# Altium PCB SV601275A.PcbDoc (part 3 of 3)
Units mil, origin at the board's own origin, x right, y up, seen from the top; angles counter-clockwise.
Board outline 1980 x 1700 mil, 6 copper layers (Top Layer, MidLayer1, MidLayer2, Mid-Layer 3, Mid-Layer 4, Bottom Layer), stack 61.3 mil thick; 82 components, 37 nets, 191 pads, 177 vias.
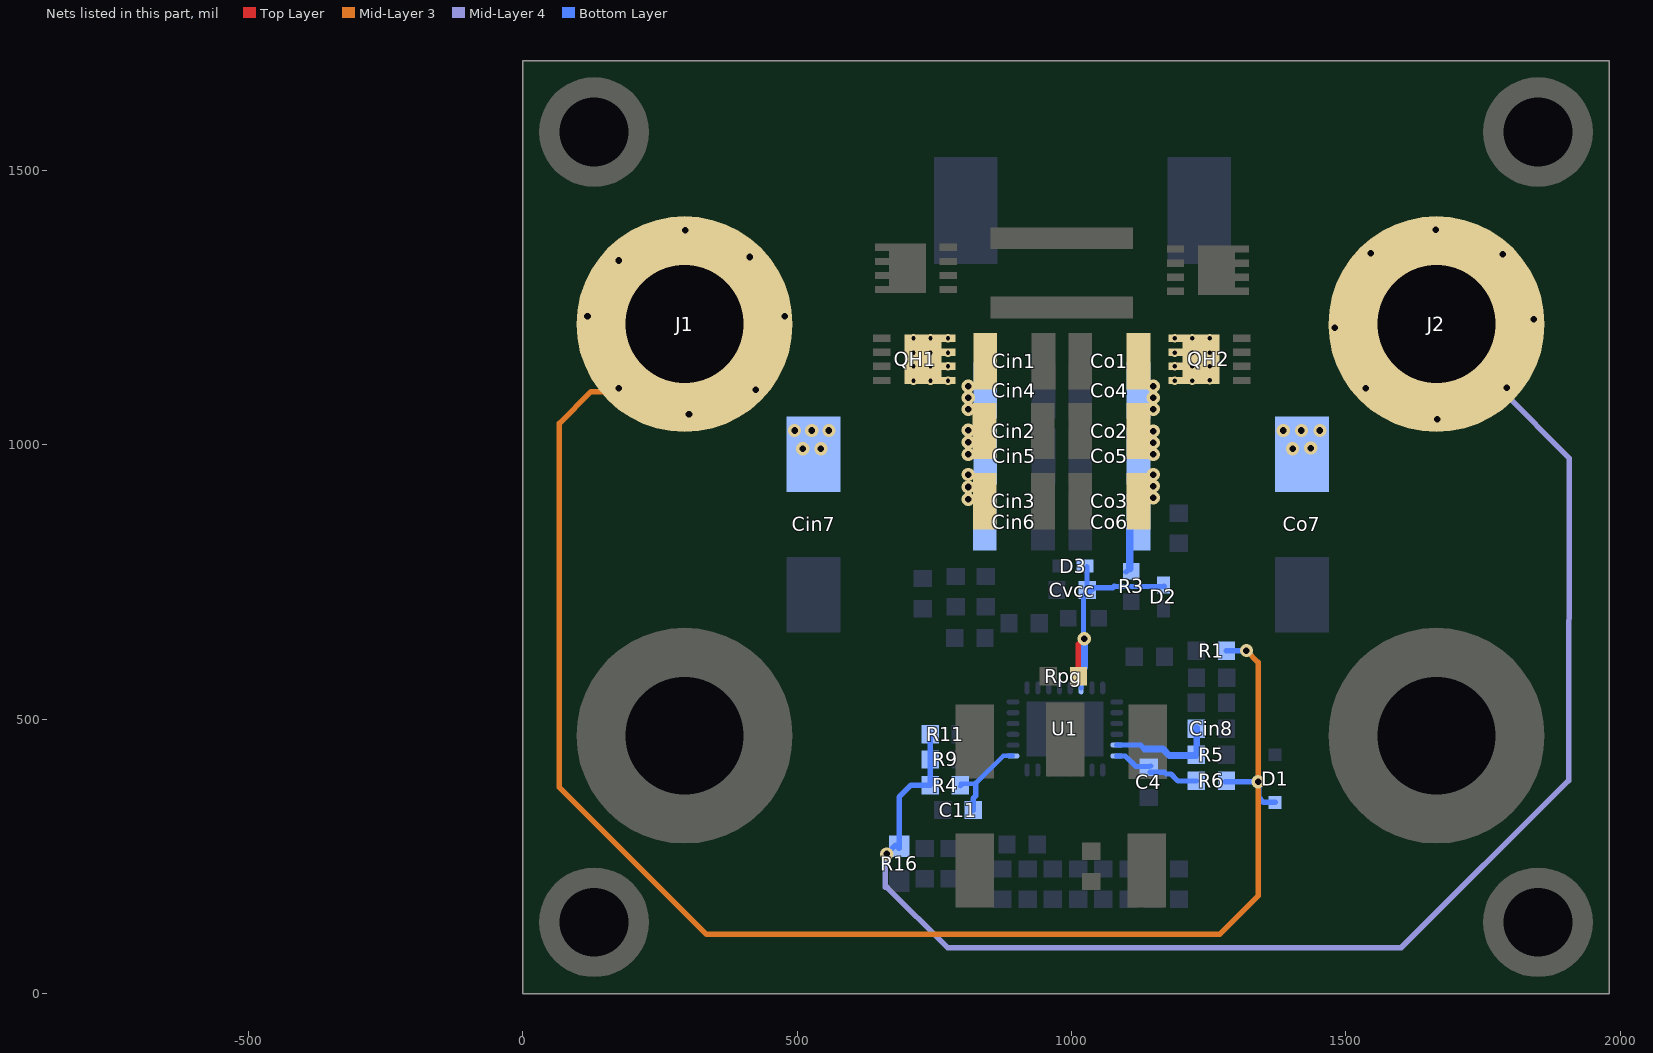
[diagram p6: the nets of this part, all layers, seen from the top]

## Via types
v1: diameter 24, hole 12, Top Layer to Bottom Layer, tented both sides, 91 vias
v2: diameter 15.75, hole 7.87, Top Layer to Bottom Layer, tented both sides, 60 vias
v3: diameter 28, hole 14, Top Layer to Bottom Layer, tented both sides, 17 vias
v4: diameter 19.68, hole 7.87, Top Layer to Bottom Layer, 8 vias
v5: diameter 19.69, hole 7.87, Top Layer to Bottom Layer, 1 vias

## Nets (pads, with @x,y where several pads share a name; then routed paths per layer and width w, separated by ;. In a path a pad name is that pad's centre, name@x,y a point inside that pad or via, vN(x,y) a via of type N, cw(c..) or ccw(c..) an arc to the next point about the centre after c; other vN are vias at no path point) (continued)
VCC: Cvcc.1 D2.2 D3.2 Rpg.1 U1.20 | length 445.8
  Top Layer w10: Rpg.1@1012.72,578.05 1012.72,636.31 v1(1023.16,646.75)
  Bottom Layer w9: v1@1021.96,648.13 Cvcc.1@1021.96,725.37 ; 1077.62,742 D2.2@1169,742
  Bottom Layer w9.4: U1.20@1017.53,557.17 1017.53,587.42 1023.16,593.05
  Bottom Layer w10: Cvcc.1@1021.96,725.37 Cvcc.1@1030.13,733.55 ; v1(1023.16,646.75) v1@1023.34,646.57 ; v1@1023.25,646.84 v1@1023.34,646.75 ; D3.2@1028.26,777.75 1028.26,735.42 Cvcc.1@1030.13,733.55 ; Cvcc.1@1030.46,729 1041.46,740 1075.62,740 1077.62,742 ; Cvcc.1@1033.33,736.75 Cvcc.1@1030.13,733.55
  Bottom Layer w13: 1023.34,594.57 v1@1023.34,646.57
VIN: Cin1.1 Cin2.1 Cin3.1 Cin4.1 Cin5.1 Cin6.1 Cin7.1 D1.2 J1.1 QH1.5 QH1.6 QH1.7 QH1.8 QH1.9 R1.2 R6.1 | length 2812.5
  Mid-Layer 3 w10: J1.1@164.87,1096.98 124.83,1096.98 67,1039.15 67,376 335,108 1269.98,108 1340,178.02 v1(1340,386.08) 1340,603.75 v1(1318.75,625)
  Bottom Layer w10: R6.1@1280,386.15 1282.56,386.15 v1(1340,386.08) ; R1.2@1282,625 v1(1318.75,625) ; v1@1341.61,386.15 1341.61,357.01 1349.93,348.69 D1.2@1371,348.69
  other v1: 812,900.75 812,923.25 812,945.75 812,982.62 510.38,993 543.29,993 812,1004.75 495.38,1026.16 526.71,1026.16 558,1026.16 812,1026.75 303,1055.87 812,1064.75 812,1085.75 424.38,1100.35 175,1103 812,1106.74 118,1234 477.15,1234 175,1336 414,1342.23 296,1390.84
  other v2: 712,1117 743,1117 775,1117 712,1143 743,1143 775,1143 712,1168 743,1168 775,1168 712,1194 743,1194 775,1194
VIN_IC: Cin8.1 R5.1 U1.27 | length 202.8
  Bottom Layer w9.4: U1.27@1082.49,452.84 1126.16,452.84
  Bottom Layer w10: 1126.16,452.84 1133.21,445.79
  Bottom Layer w12: 1133.21,445.79 1166.5,445.79 1178.3,434 1227,434 1228.25,435.25 Cin8.1@1228.25,484
VISNS: C4.2 R6.2 U1.28 | length 155.7
  Bottom Layer w9.4: U1.28@1082.49,433.15 1098,433.15 1117.42,413.73 C4.2@1140.84,413.73 ; C4.2@1142.98,403.41 1169.23,403.41 1172.64,400 1181.15,400 1192.44,388.71 ; C4.2@1144.38,414.78 C4.2@1144.59,415 ; 1194,387.63 R6.2@1227.44,387.63
VOUT: Co1.1 Co2.1 Co3.1 Co4.1 Co5.1 Co6.1 Co7.1 J2.1 QH2.5 QH2.6 QH2.7 QH2.8 QH2.9 R3.2 R4.2 R9.1 R11.1 R16.1 | length 2678.2
  Mid-Layer 4 w10: 661,193.74 v1@661,254.75 ; 664.08,193.74 774.27,84 1600.9,84 1905.85,388.06 1906.77,975.98 1786.85,1095.9 1791.46,1100.5 1791.46,1125.9 1793.16,1124.19 v1(1793.16,1104) J2.1@1793.16,1100.97
  Bottom Layer w10: v1@657.22,254.75 v1(663.4,254.75) 679.4,270.75 R16.1@685.4,264.75 ; R16.1@685.96,265.05 686,358.2 707.8,380 R4.2@742.44,380 R11.1@742.44,473.84 ; R3.2@1099,768.3 R3.2@1100.24,769.03 ; Co6.1@1106,849.64 Co6.1@1122.11,865.75
  Bottom Layer w14: R3.2@1106,774.24 Co6.1@1106,849.64
  other v1: 1149,903.75 1149,924.75 1149,945.75 1149,982.62 1403,993 1436,994 1149,1003.88 1149,1025.14 1386,1026.16 1419,1026.16 1452.68,1026.16 1666.16,1046.9 1149,1064.75 1149,1085.75 1536,1103 1149,1106.75 1480,1213.74 1842.16,1228.9 1786,1347 1545,1349 1664,1391.61
  other v2: 1188.16,1117 1220,1117 1252,1118 1188,1143 1220,1143 1252,1143 1188,1168 1220,1168 1252,1168 1188,1194 1220,1194 1252,1194
VOUTSNS: C11.1 R4.1 U1.9 | length 169.2
  Bottom Layer w8: R4.1@797.56,377.56 R4.1@800,380 ; R4.1@798,382.26 824.61,382.26 825.96,383.61 ; 827.35,385 875.5,433.15 U1.9@893.51,433.15
  Bottom Layer w10: C11.1@820.78,334.58 820.78,355.44 825.96,360.63 825.96,383.61
pads on no net: H3. H4. H5.0 H6.0 H7. H8. LBL1.0

## Polygon pours and split planes (outlines as drawn)
SW2 on Bottom Layer "Bottom Layer-SW2" (solid, pour order 64): 1325.65,1268 1325.65,1526 1179,1526 1179.37,1268
GND on Bottom Layer "Bot Layer-GND2" (solid, remove dead copper, pour order 69): 7.82,1217.2 1962.51,1216.97 1969.62,1299.34 1969.62,14 9.63,14
VIN on Bottom Layer "Bot Layer-VIN" (solid, remove dead copper, pour order 68): 869.8,1211.23 707.81,1211.79 707.81,1688.01 13.64,1687.97 11.93,855.39 730.43,855.39 868.97,855.27
VOUT on Bottom Layer "Bot Layer-VOUT" (solid, remove dead copper, pour order 67): 1098,1221.29 1238.86,1221.29 1267.63,1191.99 1267.63,1105.09 1340.03,1105.09 1340.98,1690.13 1964,1688.1 1964,850.76 1271.27,853.21 1222.99,853.4 1222.88,895.92 1164.46,895.92 1152.56,882.78 1152.56,807 1098,807 1098.16,854.42
SW1 on Bottom Layer "Bottom Layer-No Net" (solid, remove dead copper, pour order 65): 631.4,1139.6 636.21,1134.79 679.79,1134.79 684.06,1139.06 684.06,1215.22 694.84,1226 920.29,1226 940.04,1245.75 940.04,1535.96 926,1550 741,1550 714,1523 714,1381 713.29,1380.71 650.1,1380.97 632.69,1363.66
SW2 on Bottom Layer "Bottom Layer-No Net 1" (solid, remove dead copper, pour order 66): 1294.99,1109 1369.55,1109 1376.94,1116.64 1377,1320.26 1351,1346 1326,1371 1325.83,1519.99 1324.28,1523.73 1298.01,1549.98 1078.03,1550.03 1048.93,1520.94 1048.93,1243.96 1066.66,1226 1280.96,1226.05 1288.25,1218.74 1288.02,1115.99
VIN on Top Layer "Top Layer-VIN" (solid, remove dead copper, pour order 41): 865.14,1216.99 683,1217.01 683,1108 627,1108 627,1265 972,1265 972,1689 14,1689.97 14,844.78 865,844.03
NetQl1_1 on Top Layer "Top Layer-Q1-1" (solid, pour order 38): 759.96,1342.61 800,1343 800,1441 813,1454 1195.02,1454 1205.99,1442.99 1205.39,1276.51 759.96,1276.51
GND on Top Layer "Top Layer-GND2" (solid, remove dead copper, pour order 42): 10,830 1970,830 1970,10 10,10
VOUT on Top Layer "Top Layer-VOUT" (solid, remove dead copper, pour order 40): 1098.99,1218.65 1279,1219 1279,1100 1384.49,1099.65 1383.03,1409.78 997.88,1409.78 997.85,1689 1965.66,1688.74 1971.03,843.97 1099,844.03
SW2 on Top Layer "Top Layer-SW2" (solid, remove dead copper, pour order 37): 1238.2,1398 1374.48,1398 1387.1,1385.32 1386.89,1118.89 1379,1111 1293,1111 1293,1244 1228,1244 1228.26,1388.08
GND on Top Layer "Top Layer-GND" (solid, remove dead copper, pour order 39): 884.02,1266 1077,1266 1076.7,765.16 908.64,765.16 883.63,769.22
SW1 on Top Layer "Top Layer-SW1" (solid, remove dead copper, pour order 36): 597.89,1142.51 598.13,1371.14 608.04,1381.03 733.71,1381.03 740,1374.75 740,1271.83 740,1231 733,1224 691.76,1224 674.07,1205.9 672.78,1205.01 672.78,1139.8 668.73,1135.7 605.43,1135.04
GND on MidLayer2 "MidLayer2-GND" (solid, pour order 53): 14.55,1690.59 15.54,1689.62 1960.63,1689.62 1963.55,1686.76 1965,9 1912.53,11.14 -14,11.14 12.48,37.08 12.48,1687.64
SW2 on MidLayer2 "MidLayer1-No Net 1" (solid, remove dead copper, pour order 51): 1234.85,1387.85 1329.36,1387.85 1337.02,1380.18 1336.98,1253.33 1331.66,1248 1234,1248 1228,1254 1228,1381
SW1 on MidLayer2 "MidLayer1-No Net 1" (solid, remove dead copper, pour order 50): 633.76,1381 734.5,1381 740.29,1375.21 740.26,1256.65 734.6,1251 633,1251 628,1256 628,1375.24
VIN on MidLayer2 "MidLayer1-No Net 1" (solid, remove dead copper, pour order 49): 699.3,1217.43 784.96,1217.43 792.74,1209.65 792.7,1097.81 787.65,1092.76 699.24,1092.76 692.96,1099.04 692.96,1211.08
VOUT on MidLayer2 "MidLayer1-No Net 1" (solid, remove dead copper, pour order 48): 1180.7,1215.92 1266.97,1215.92 1273.03,1209.85 1273,1099.73 1266.35,1093.08 1178.12,1093.08 1173.32,1097.88 1173.32,1208.54
NetQl1_1 on MidLayer2 "Top Layer-Q1-1" (solid, pour order 52): 760,1343 800.04,1343.39 800.04,1441.39 813.04,1454.39 1195.06,1454.39 1206.03,1443.38 1205.44,1276.9 760,1276.9
VOUT on MidLayer1 "Mid-Layer1-VOUT" (solid, remove dead copper, pour order 46): 1131.25,859.29 1131.25,1671.01 1961,1672.99 1962,859
VIN on MidLayer1 "MId-Layer-1-VIN" (solid, remove dead copper, pour order 45): 829,1689 13.3,1689 12.87,864 828,864
GND on MidLayer1 "Mid Layer1-GND2" (solid, remove dead copper, pour order 47): 14.16,1665.13 1963.85,1673.87 1962.85,10.79 15.16,5.78
SW1 on MidLayer1 "MidLayer1-No Net" (solid, remove dead copper, pour order 43): 632.24,1381.24 732.76,1381.24 740.23,1373.76 740.23,1254.84 732.4,1247 635,1247 625,1257 625,1374
SW2 on MidLayer1 "MidLayer1-No Net 1" (solid, remove dead copper, pour order 44): 1236.54,1392.54 1333.46,1392.54 1341.02,1384.98 1340.98,1253.98 1332.35,1245.35 1233.97,1245.35 1228,1251.32 1228,1384
GND on Mid-Layer 4 "Mid-Layer 4-GND" (solid, pour order 63): 17.57,1688.52 21.22,1692 1974,1692 1967.53,1685.83 1967.53,8.08 1963.24,4 17.57,4
VIN on Mid-Layer 4 "MidLayer1-No Net 1" (solid, remove dead copper, pour order 59): 699.08,1219 786.55,1219 793.02,1212.52 792.99,1098.74 786.95,1092.7 698.41,1092.7 692.57,1098.54 692.57,1212.49
SW1 on Mid-Layer 4 "MidLayer1-No Net 1" (solid, remove dead copper, pour order 61): 633.7,1381 718,1381 740.75,1358.25 740.71,1255.71 735,1250 632.42,1250 628,1254.42 628,1375.3
SW2 on Mid-Layer 4 "MidLayer1-No Net 1" (solid, remove dead copper, pour order 62): 1232,1389 1333.06,1389 1338.03,1384.03 1337.98,1253.4 1332.58,1248 1233,1248 1228,1253 1228,1385
VOUT on Mid-Layer 4 "MidLayer1-No Net 1" (solid, remove dead copper, pour order 60): 1176.64,1219 1269,1219 1274.03,1213.97 1273.99,1098.12 1267.87,1092 1175.5,1092 1170.64,1096.86 1170.64,1213
GND on Mid-Layer 3 "Mid-Layer 3-GND" (solid, pour order 58): 24.19,1667.41 27.51,1670.55 1963.27,1670.55 1969.19,1664.97 1969.19,10.09 1968.77,9.7 24.19,9.7
SW1 on Mid-Layer 3 "MidLayer1-No Net 1" (solid, remove dead copper, pour order 56): 634.72,1381.31 735.52,1381.31 740.81,1376.01 740.77,1256.77 735,1251 633,1251 628,1256 628,1374.58
SW2 on Mid-Layer 3 "MidLayer1-No Net 1" (solid, remove dead copper, pour order 57): 1232.74,1389 1332.45,1389 1338.02,1383.43 1337.98,1254.98 1330.82,1247.83 1234.17,1247.83 1227.85,1254.15 1227.85,1384.11
VOUT on Mid-Layer 3 "MidLayer1-No Net 1" (solid, remove dead copper, pour order 55): 1177.26,1219 1269.39,1219 1273.6,1214.79 1273.56,1096.68 1269.89,1093 1178.37,1093 1171,1100.37 1171,1212.74
VIN on Mid-Layer 3 "MidLayer1-No Net 1" (solid, remove dead copper, pour order 54): 697.32,1218.24 786.91,1218.24 792.02,1213.12 791.99,1099.23 785.76,1093 702,1093 693.57,1101.43 693.57,1214.49

## Keep-outs
Keep-Out Layer:
  lines w10: -5,-5 -5,1705 1985,1705 1985,-5 -5,-5

## Other copper
Top Layer:
  pour cut-out: 961.39,1332.47 961.39,1332.9 cw(c985.32,1332.9) 985.32,1356.83 985.97,1356.83 cw(c985.97,1332.47) 1010.33,1332.47 cw(c987.19,1332.47) 987.19,1309.33 984.53,1309.33 cw(c984.53,1332.47)
  pour cut-out: 961.39,1292.86 cw(c985.54,1293.07) 985.32,1317.22 985.97,1317.22 cw(c985.97,1292.86) 1010.33,1292.86 cw(c987.19,1292.86) 985.87,1269.75 cw(c984.53,1292.86)
  pour cut-out: 825.44,782.37 823.58,773 818.27,765.06 810.33,759.76 800.97,757.9 791.6,759.76 783.67,765.06 778.36,773 776.5,782.37 778.36,791.73 783.67,799.67 791.6,804.98 800.97,806.84 810.33,804.98 818.27,799.67 823.58,791.73
  pour cut-out: 919.86,711.86 918,702.49 912.69,694.55 904.75,689.25 895.39,687.39 886.03,689.25 878.09,694.55 872.78,702.49 870.92,711.86 872.78,721.22 878.09,729.16 886.03,734.47 895.39,736.33 904.75,734.47 912.69,729.16 918,721.22
  text ".Layer_Name" at 129,-1122.49 h60
MidLayer1:
  pour cut-out: 961.28,1292.95 961.28,1293.38 cw(c985.21,1293.38) 985.21,1317.31 985.86,1317.31 cw(c985.86,1292.95) 1010.22,1292.95 cw(c987.08,1292.95) 987.08,1269.81 984.42,1269.81 cw(c984.42,1292.95)
  pour cut-out: 961.49,1333.47 961.49,1333.9 cw(c985.42,1333.9) 985.42,1357.83 986.07,1357.83 cw(c986.07,1333.47) 1010.43,1333.47 cw(c987.29,1333.47) 987.29,1310.33 984.63,1310.33 cw(c984.63,1333.47)
  pour cut-out: 826.32,781.54 824.45,772.17 819.15,764.24 811.21,758.93 801.85,757.07 792.48,758.93 784.54,764.24 779.24,772.17 777.38,781.54 779.24,790.9 784.54,798.84 792.48,804.15 801.85,806.01 811.21,804.15 819.15,798.84 824.45,790.9
  text ".layer_Name" at 129,-1124 h60
MidLayer2:
  pour cut-out: 961.07,1291.95 961.07,1292.38 cw(c985,1292.38) 985,1316.31 985.65,1316.31 cw(c985.65,1291.95) 1010.01,1291.95 cw(c986.87,1291.95) 986.87,1268.81 984.21,1268.81 cw(c984.21,1291.95)
  pour cut-out: 961.07,1332.86 961.07,1333.29 cw(c985,1333.29) 985,1357.22 985.65,1357.22 cw(c985.65,1332.86) 1010.01,1332.86 cw(c986.87,1332.86) 986.87,1309.72 984.21,1309.72 cw(c984.21,1332.86)
  pour cut-out: 825.44,782.37 823.58,773 818.27,765.06 810.33,759.76 800.97,757.9 791.6,759.76 783.67,765.06 778.36,773 776.5,782.37 778.36,791.73 783.67,799.67 791.6,804.98 800.97,806.84 810.33,804.98 818.27,799.67 823.58,791.73
  text ".layer_Name" at 129,-1122 h60
Mid-Layer 3:
  pour cut-out: 960.88,1333.26 960.88,1333.69 cw(c984.81,1333.69) 984.81,1357.62 985.46,1357.62 cw(c985.46,1333.26) 1009.82,1333.26 cw(c986.68,1333.26) 986.68,1310.12 984.02,1310.12 cw(c984.02,1333.26)
  pour cut-out: 960.79,1292.49 960.79,1292.92 cw(c984.73,1292.92) 984.73,1316.85 985.38,1316.85 cw(c985.38,1292.49) 1009.73,1292.49 cw(c986.59,1292.49) 986.59,1269.35 983.93,1269.35 cw(c983.93,1292.49)
  pour cut-out: 825.44,782.37 823.58,773 818.27,765.06 810.33,759.76 800.97,757.9 791.6,759.76 783.67,765.06 778.36,773 776.5,782.37 778.36,791.73 783.67,799.67 791.6,804.98 800.97,806.84 810.33,804.98 818.27,799.67 823.58,791.73
  text ".layer_Name" at 127,-1124 h60
Mid-Layer 4:
  pour cut-out: -788.42,451.51 cw(c-788.42,469.86) -806.77,469.86 cw(c-788.42,469.86) -788.42,488.22 cw(c-788.42,469.86) -770.07,469.86 cw(c-788.42,469.86)
  pour cut-out: 961.44,1332.76 961.44,1333.19 cw(c985.37,1333.19) 985.37,1357.12 986.02,1357.12 cw(c986.02,1332.76) 1010.38,1332.76 cw(c987.24,1332.76) 987.24,1309.62 984.58,1309.62 cw(c984.58,1332.76)
  pour cut-out: 961.23,1293.6 961.23,1294.03 cw(c985.16,1294.03) 985.16,1317.96 985.81,1317.96 cw(c985.81,1293.6) 1010.17,1293.6 cw(c987.03,1293.6) 987.03,1270.46 984.37,1270.46 cw(c984.37,1293.6)
  pour cut-out: 825.14,781.61 823.27,772.24 817.97,764.3 810.03,759 800.67,757.14 791.3,759 783.36,764.3 778.06,772.24 776.2,781.61 778.06,790.97 783.36,798.91 791.3,804.22 800.67,806.08 810.03,804.22 817.97,798.91 823.27,790.97
  text ".layer_Name" at 127,-1118 h60
Bottom Layer:
  rectangle net VOUT: 1131.67,815.36 1152,887.75
  pour cut-out: 961.49,1332.05 961.49,1332.48 cw(c985.42,1332.48) 985.42,1356.41 986.07,1356.41 cw(c986.07,1332.05) 1010.43,1332.05 cw(c987.29,1332.05) 987.29,1308.91 984.63,1308.91 cw(c984.63,1332.05)
  pour cut-out: 961.79,1293.37 961.79,1293.8 cw(c985.72,1293.8) 985.72,1317.73 986.37,1317.73 cw(c986.37,1293.37) 1010.73,1293.37 cw(c987.59,1293.37) 987.59,1270.23 984.93,1270.23 cw(c984.93,1293.37)
  pour cut-out: 1383.95,389.24 1430,389.24 1430,8.56 1418,8.56 1418,379.17 1384.02,379.17
  pour cut-out: 771,172 771,14.81 784,14.81 784,172
  pour cut-out: 880.61,541.77 1120.5,541.77 1117.31,544.97 1117.31,554.75 1113.26,558.79 890.03,558.79
  pour cut-out: 819,799.75 818.62,799.37 818.62,734.47 739,734.47 739,805 819,805
  text ".Layer_Name" at 129,-1122.49 h60

## Silkscreen, mask and mechanical layers (free items; w line width, h text height)
Top Overlay:
  region: 1740.56,775.58 1740.56,697 1937.08,697 1937.08,775.58
  text "VOUT" at 1470,1502 h50
  text "VIN" at 318,1492 h50
  text ".PRJ_Number" at 1294.56,713 h40
  text ".PCB_Rev" at 1636,713 h40
  text "-" at 1689.56,710 h40
  text "GND" at 302,136 h60
  text "GND" at 1541,130 h60
  text ".Layer_Name" at 129,-1122.49 h60
Bottom Overlay:
  text ".Layer_Name" at 129,-1122.49 h60
Top Paste:
  text ".Layer_Name" at 129,-1122.49 h60
Bottom Paste:
  text ".Layer_Name" at 129,-1122.49 h60
Top Solder:
  text ".Layer_Name" at 129,-1122.49 h60
  text ".Layer_Name" at 129,-1122.49 h60
Bottom Solder:
  text ".Layer_Name" at 129,-1122.49 h60
Drill Guide:
  text ".Layer_Name" at 129,-1122.49 h60
M1 Board Outline:
  the board outline again, w10
  text ".Layer_Name" at 129,-1122.49 h60
M2 Board Dimensions:
  rectangle: -471.5,-618.5 -96.5,-493.5
  rectangle: -596.5,-493.5 -471.5,-368.5
  lines w7: -596.5,-493.5 403.5,-493.5 ; -471.5,-618.5 -471.5,-368.5 ; -346.5,-618.5 -346.5,-368.5 ; -96.5,-618.5 -96.5,-368.5 ; 153.5,-618.5 153.5,-368.5 ; -596.5,-618.5 403.5,-618.5 403.5,-368.5 -596.5,-368.5 -596.5,-431 -596.5,-556 -596.5,-618.5
  lines w10: -596.5,-683.5 -596.5,-663.5 ; -536.5,-693.5 -596.5,-673.5 ; -536.5,-653.5 -596.5,-673.5 ; -372.42,-673.5 -596.5,-673.5 ; 179.42,-673.5 403.5,-673.5 ; 343.5,-693.5 403.5,-673.5 ; 343.5,-653.5 403.5,-673.5 ; 403.5,-683.5 403.5,-663.5
  text "1000 (mil)" at -362.42,-709.49 h60
  text ".Layer_Name" at 129,-1122.49 h60
M3 3D STEP Top:
  text ".Layer_Name" at 129,-1122.49 h60
M4 3D STEP Bottom:
  text ".Layer_Name" at 129,-1122.49 h60
M5 Assembly Top:
  lines w10: -740,-1194.17 5860,-1194.17 ; -740,-990.83 5862,-990.83 ; -740,-787.5 -740,-1397.5 3265,-1397.5 5862,-1397.5 5862,-787.5 -739.5,-787.5 -739.5,-1397.5 836,-1397.5 ; 1725,-1397.5 1725,-787.5 ; 2992,-990.83 2992,-787.5 ; 3832,-990.83 3832,-787.5 ; 4454,-1404 4454,-1201.17
  text "SYNC" at 1156,152 h40 r90
  text "COMPONENTS MARKED 'DNP' SHOULD NOT BE POPULATED." at 705.5,-582.5 h60
  text "ASSEMBLY VARIANT:" at 705,-698 h60
  text ".VariantName" at 1741,-698 h60
  text "PCB VIEWED FROM TOP SIDE" at -676.5,-919.67 h60
  text "BOARD #:" at 1800,-919.67 h60
  text ".PRJ_Number" at 2345.5,-919.67 h60
  text "REV:" at 3190,-919.67 h60
  text ".PCB_Rev" at 3481.5,-919.67 h60
  text "SVN REV:" at 4028,-919.67 h60
  text ".VersionControl_RevNumber" at 4534,-919.67 h60
  text "IGNORE ->" at -676.5,-1122.49 h60
  text "PLOT NAME =" at -676.5,-1328.34 h60
  text ".plot_File_Name" at 129,-1328.34 h60
  text "GENERATED    :" at 1802,-1328.34 h60
  text ".Print_Date" at 2671.5,-1328.34 h60
  text ".Print_Time" at 3400.5,-1328.34 h60
  text "TEXAS INSTRUMENTS" at 4665,-1328.34 h60
M6 Assembly Bottom:
  lines w10: -740.5,-991.33 5861.5,-991.33 ; -738.5,-1194.67 5861.5,-1194.67 ; 667.5,-1404.5 667.5,-1201.67 ; 1289.5,-991.33 1289.5,-788 ; 2129.5,-991.33 2129.5,-788 ; 3396.5,-1398 3396.5,-788 ; 4285.5,-1398 5861,-1398 5861,-788 -740.5,-788 -740.5,-1398 1856.5,-1398 5861.5,-1398 5861.5,-788
  text "SVN REV:" at 1089,-451 h60
  text "COMPONENTS MARKED 'DNP' SHOULD NOT BE POPULATED." at 5654,-582 h60
  text ".VariantName" at 4610,-698 h60
  text "ASSEMBLY VARIANT:" at 5649,-698 h60
  text ".VersionControl_RevNumber" at 587.5,-920.17 h60
  text ".PCB_Rev" at 1640,-920.17 h60
  text "REV:" at 1931.5,-920.17 h60
  text ".PRJ_Number" at 2776,-920.17 h60
  text "BOARD #:" at 3321.5,-920.17 h60
  text "PCB VIEWED FROM BOTTOM SIDE" at 5798,-920.17 h60
  text "IGNORE ->" at 2099.85,-1122.49 h60
  text "TEXAS INSTRUMENTS" at 456.5,-1328.84 h60
  text ".Print_Time" at 1721,-1328.84 h60
  text ".Print_Date" at 2450,-1328.84 h60
  text "GENERATED    :" at 3319.5,-1328.84 h60
  text ".plot_File_Name" at 4992.5,-1328.84 h60
  text "PLOT NAME =" at 5798,-1328.84 h60
M9 Title Sheet:
  lines w10: -939.5,777.5 -739.5,777.5 ; -939.5,3152.5 -739.5,3152.5 ; -939.5,5527.5 -739.5,5527.5 ; 1560.5,-1597.5 1560.5,-1397.5 ; 1560.5,7702.5 1560.5,7902.5 ; 4060.5,-1597.5 4060.5,-1397.5 ; 4060.5,7702.5 4060.5,7902.5 ; 5873,-1397.5 5873,-787.5 10855.5,-787.5 ; 6560.5,-1597.5 6560.5,-1397.5 ; 6560.5,7702.5 6560.5,7902.5 ; 9060.5,-1597.5 9060.5,-1397.5 ; 9060.5,7702.5 9060.5,7902.5 ; 10855.5,-1397.5 10855.5,-787.5 ; 10855.5,-1087.5 13855.5,-1087.5 ; 10855.5,-487.5 13855.5,-487.5 ; 10856.5,106.5 13856.5,106.5 ; 11560.5,-1597.5 11560.5,-1397.5 ; 11560.5,7702.5 11560.5,7902.5 ; 12360.5,-1387.5 12360.5,-787.5 ; 13855.5,-787.5 10855.5,-787.5 ; 13855.5,-187.5 10855.5,-187.5 ; 13860.5,-197.5 13860.5,-1397.5 ; 13860.5,607 10856.5,607 10855.5,607 10855.5,106.5 10855.5,-187.5 ; 13860.5,777.5 14060.5,777.5 ; 13860.5,3152.5 14060.5,3152.5 ; 13860.5,5527.5 14060.5,5527.5 ; 10855.5,-787.5 10855.5,-187.5 ; 13860.5,-1397.5 -739.5,-1397.5 -739.5,7702.5 13860.5,7702.5 13860.5,-1397.5 ; -939.5,-1597.5 14060.5,-1597.5 14060.5,7902.5 -939.5,7902.5 -939.5,-1597.5
  text "1" at 291.84,7772.5 h70
  text "2" at 2787.5,7772.5 h70
  text "3" at 5276.84,7772.5 h70
  text "4" at 7783.51,7772.5 h70
  text "5" at 10282.5,7772.5 h70
  text "6" at 12787.5,7772.5 h70
  text "A" at -864.5,6629.5 h70
  text "A" at 13935.5,6629.5 h70
  text "B" at -864.5,4249.5 h70
  text "B" at 13935.5,4249.5 h70
  text "C" at -864.5,1874.5 h70
  text "C" at 13935.5,1874.5 h70
  text "PROJECT TITLE:" at 10895.5,13.5 h45
  text ".PRJ_Number" at 10945.5,-119.83 h70
  text "DESIGNED FOR:" at 10895.5,-287.5 h45
  text ".PRJ_Customer" at 10945.5,-427.5 h70
  text "D" at -864.5,-495.5 h70
  text "D" at 13935.5,-495.5 h70
  text "FILE NAME:" at 10895.5,-587.5 h45
  text ".PRJ_Title" at 10945.5,-707.5 h70
  text "ENGINEER:" at 10895.5,-877.5 h45
  text "LAYOUT BY:" at 12400.5,-877.5 h45
  text ".PRJ_Engineer" at 10945.5,-1032.49 h70
  text ".PCB_Layout" at 12451,-1032.49 h70
  text ".Layer_Name" at 129,-1122.49 h60
  text "ALTIUM DESIGNER VERSION:" at 12400.5,-1187.5 h45
  text "1:1" at 10945.5,-1320.83 h70
  text ".Application_BuildNumber" at 12451,-1320.83 h70
  text "1" at 291.84,-1527.5 h70
  text "2" at 2787.5,-1527.5 h70
  text "3" at 5276.84,-1527.5 h70
  text "4" at 7783.51,-1527.5 h70
  text "5" at 10282.5,-1527.5 h70
  text "6" at 12787.5,-1527.5 h70
M10 Fab Notes:
  drawing of 185 lines, arcs and shapes, not listed
  text "DESIGN INFORMATION" at 11925.02,5657.55 h60
  text "MIN. TRACK WIDTH:" at 11280.46,5477.55 h60
  text "8" at 12376.7,5477.55 h60
  text "MIL" at 12531.46,5477.55 h60
  text "MIN. CLEARANCE:" at 11280.46,5345.55 h60
  text "0.2" at 12316.7,5345.55 h60
  text "mm" at 12531.46,5345.55 h60
  text "MIN. VIA PAD SIZE:" at 11280.46,5213.55 h60
  text "24" at 12346.71,5213.55 h60
  text "MIL" at 12531.46,5213.55 h60
  text "0.05mm (2MIL)" at 11975.46,5071.84 h60
  text "MINIMUM ANNULAR RING" at 10951.23,5067.55 h60
  text "EXTERNAL" at 12683.46,5067.55 h60
  text "PER" at 11151.23,4949.55 h60
  text "IPC-D-275 CLASS 2 LEVEL C" at 11371.23,4949.55 h60
  text "+/-" at 12467,4836.55 h60
  text "MIL, HOLES" at 12859.46,4837.26 h60
  text "+/-" at 13321,4836.55 h60
  text "REGISTRATION TOLERANCES:" at 10951.23,4831.55 h60
  text "METAL" at 12151,4831.55 h60
  text "5" at 12727.2,4831.55 h60
  text "3" at 13560.2,4831.55 h60
  text "MIL" at 13676.46,4831.55 h60
  text "MATERIAL:" at 10876.46,4622.09 h60
  text "FR-4 High Tg" at 11862.9,4481.76 h60
  text "FR-408" at 11297.46,4473.19 h60
  text "X" at 11709.46,4473.19 h60
  text "OTHER" at 12785.46,4473.19 h60
  text "62 MIL (1.6mm) +/-10%" at 11617.56,4310.47 h60
  text "THICKNESS:" at 10951.23,4306.19 h60
  text "X" at 11489.4,4306.19 h60
  text "OTHER" at 12902.46,4306.19 h60
  text "TOLERANCE:" at 10951.23,4148.19 h60
  text "X" at 11790.53,4148.19 h60
  text "ANSI IPC-6012 TYPE 3 CLASS 2" at 11977.48,4148.19 h60
  text "OTHER +/-" at 11977.46,3992.19 h60
  text "BOW & TWIST:" at 10951.23,3835.19 h60
  text "X" at 11790.53,3835.19 h60
  text "ANSI IPC-6012 TYPE 3 CLASS 2" at 11977.48,3835.19 h60
  text "OTHER +/-" at 11977.46,3676.68 h60
  text "DRILLING:" at 10876.46,3538.19 h60
  text "REFERENCE:" at 10951.23,3421.19 h60
  text "X" at 11599.46,3421.19 h60
  text "AS SHOWN" at 11786.46,3421.19 h60
  text "X" at 12500.46,3421.19 h60
  text "NC_DRILL FILES" at 12637.46,3421.19 h60
  text "PTH MIN COPPER THICKNESS:" at 10951.23,3263.19 h60
  text "X" at 12301.46,3263.19 h60
  text "1MIL" at 12438.46,3263.19 h60
  text "OTHER" at 12935.46,3263.19 h60
  text "BOARD FINISH:" at 10876.46,3104.19 h60
  text "SILKSCREEN:" at 11031.68,2986.19 h60
  text "X" at 11980.46,2986.19 h60
  text "TOP" at 12106.46,2986.19 h60
  text "X" at 12490.46,2986.19 h60
  text "BOTTOM" at 12617.46,2986.19 h60
  text "SILKSCREEN COLOR:" at 11031.68,2819.19 h60
  text "X" at 11979.42,2819.19 h60
  text "WHITE" at 12106.46,2819.19 h60
  text "OTHER" at 12617.46,2819.19 h60
  text "SOLDER RESIST COLOR:" at 11031.68,2649.19 h60
  text "X" at 11597,2491 h60
  text "GREEN" at 11726.46,2489.99 h60
  text "BLUE" at 12317.46,2489.99 h60
  text "OTHER" at 12855.46,2489.99 h60
  text "IMMERSION GOLD (ENIG)" at 11937.46,2301.47 h60
  text "ENEPIG" at 13275,2298.19 h60
  text "SURFACE FINISH:" at 10876.46,2297.19 h60
  text "X" at 11750.51,2297.19 h60
  text "IMM. TIN/SILVER OR EQUIV" at 11206,2140.19 h60
  text "OTHER" at 12637.46,2140.19 h60
  text "ARRAY/PANEL:" at 10876.46,1961.19 h60
  text "CUT AND TRIM PER MECH LAYER 1" at 11937.46,1956.9 h60
  text "X" at 12614,1807.55 h60
  text "N.C. ROUTE" at 11937.46,1805.19 h60
  text "V. SCORE" at 12803.46,1805.19 h60
  text "CERTIFICATION:" at 10876.46,1668.19 h60
  text "MATERIALS AND WORKMANSHIP FOR ALL PCBS" at 11601.46,1668.19 h60
  text "TO MEET OR EXCEED THE REQUIREMENTS OF:" at 11601.46,1570.19 h60
  text "X" at 11227.96,1433.68 h60
  text "ANSI IPC-A-600F CLASS ->" at 11366.96,1433.68 h60
  text "X" at 13006.02,1433.68 h60
  text "2" at 13124.96,1433.68 h60
  text "1" at 12809.96,1432.19 h60
  text "3" at 13478.96,1432.19 h60
  text "X" at 11230.02,1274.19 h60
  text "UL 94V-0" at 11366.96,1274.19 h60
  text "X" at 12042.02,1274.19 h60
  text "RoHS" at 12178.96,1274.19 h60
  text "OTHER" at 12823.36,1274.19 h60
  text "PER ORDER" at 13220.42,1274.19 h60
  text "ADDITIONAL REQUIREMENTS:" at 10876.46,1133.19 h60
  text "MICROSECTION:" at 10951.23,1018.19 h60
  text "YES" at 11856.96,1018.19 h60
  text "REQUIRED" at 12718.46,862.04 h60
  text "BARE BOARD ELEC. TEST:" at 10951.23,859.19 h60
  text "NONE" at 12256.96,859.19 h60
  text "X" at 12591.46,859.19 h60
  text "PER ORDER" at 13310.46,859.19 h60
  text "MANUFACTURER'S UL:" at 10951.23,702.19 h60
  text "RAIL" at 12116.96,697.9 h60
  text "METAL" at 12608.77,697.9 h60
  text "X" at 12984,697.55 h60
  text "SILK" at 13120.46,697.9 h60
  text ".Layer_Name" at 129,-1122.49 h60
M11 Gerber Information:
  lines w10: -740,-1194.17 5860,-1194.17 ; -740,-990.83 5862,-990.83 ; -740,-787.5 -740,-1397.5 3265,-1397.5 5862,-1397.5 5862,-787.5 -739.5,-787.5 -739.5,-1397.5 836,-1397.5 ; 1725,-1397.5 1725,-787.5 ; 2992,-990.83 2992,-787.5 ; 3832,-990.83 3832,-787.5 ; 4454,-1404 4454,-1201.17
  text "ALL ARTWORK VIEWED FROM TOP SIDE" at -676.5,-919.67 h60
  text "BOARD #:" at 1800,-919.67 h60
  text ".PRJ_Number" at 2345.5,-919.67 h60
  text "REV:" at 3190,-919.67 h60
  text ".PCB_Rev" at 3481.5,-919.67 h60
  text "SVN REV:" at 4028,-919.67 h60
  text ".VersionControl_RevNumber" at 4534,-919.67 h60
  text "LAYER NAME =" at -676.5,-1122.49 h60
  text "PLOT NAME =" at -676.5,-1328.34 h60
  text ".plot_File_Name" at 129,-1328.34 h60
  text "GENERATED    :" at 1802,-1328.34 h60
  text ".Print_Date" at 2671.5,-1328.34 h60
  text ".Print_Time" at 3400.5,-1328.34 h60
  text "TEXAS INSTRUMENTS" at 4665,-1328.34 h60
M12 Stackup:
  drawing of 399 lines, arcs and shapes, not listed
  text "Layer" at 9380.7,7576.5 h60
  text "Name" at 9790.61,7576.5 h60
  text "Material" at 10720.35,7576.5 h60
  text "Thickness" at 11580.12,7576.5 h60
  text "Constant" at 12229.96,7576.5 h60
  text "Board Layer Stack" at 12799.82,7576.5 h60
  text "Top Overlay" at 9790.61,7456.5 h60
  text "Top Solder" at 9790.61,7336.5 h60
  text "Solder Resist" at 10720.35,7336.5 h60
  text "0.40mil" at 11580.12,7336.5 h60
  text "3.5" at 12229.96,7336.5 h60
  text "1" at 9380.7,7216.5 h60
  text "Top Layer" at 9790.61,7216.5 h60
  text "2.80mil" at 11580.12,7216.5 h60
  text "Dielectric1" at 9790.61,7096.5 h60
  text "FR-4" at 10720.35,7096.5 h60
  text "8.90mil" at 11580.12,7096.5 h60
  text "4.8" at 12229.96,7096.5 h60
  text "2" at 9380.7,6976.5 h60
  text "MidLayer1" at 9790.61,6976.5 h60
  text "2.80mil" at 11580.12,6976.5 h60
  text "Dielectric2" at 9790.61,6856.5 h60
  text "FR-4" at 10720.35,6856.5 h60
  text "8.90mil" at 11580.12,6856.5 h60
  text "4.8" at 12229.96,6856.5 h60
  text "3" at 9380.7,6736.5 h60
  text "MidLayer2" at 9790.61,6736.5 h60
  text "2.80mil" at 11580.12,6736.5 h60
  text "Dielectric3" at 9790.61,6616.5 h60
  text "FR-4" at 10720.35,6616.5 h60
  text "8.90mil" at 11580.12,6616.5 h60
  text "4.8" at 12229.96,6616.5 h60
  text "4" at 9380.7,6496.5 h60
  text "Mid-Layer 3" at 9790.61,6496.5 h60
  text "2.80mil" at 11580.12,6496.5 h60
  text "Dielectric4" at 9790.61,6376.5 h60
  text "FR-4" at 10720.35,6376.5 h60
  text "8.90mil" at 11580.12,6376.5 h60
  text "4.8" at 12229.96,6376.5 h60
  text "5" at 9380.7,6256.5 h60
  text "Mid-Layer 4" at 9790.61,6256.5 h60
  text "2.80mil" at 11580.12,6256.5 h60
  text "Dielectric5" at 9790.61,6136.5 h60
  text "FR-4" at 10720.35,6136.5 h60
  text "8.90mil" at 11580.12,6136.5 h60
  text "4.8" at 12229.96,6136.5 h60
  text "6" at 9380.7,6016.5 h60
  text "Bottom Layer" at 9790.61,6016.5 h60
  text "2.80mil" at 11580.12,6016.5 h60
  text "Bottom Solder" at 9790.61,5896.5 h60
  text "Solder Resist" at 10720.35,5896.5 h60
  text "0.40mil" at 11580.12,5896.5 h60
  text "3.5" at 12229.96,5896.5 h60
  text "Bottom Overlay" at 9790.61,5776.5 h60
  text ".Layer_Name" at 129,-1122.49 h60
M13 Component Bodies Top:
  text ".Layer_Name" at 129,-1122.49 h60
M14 Component Bodies Bottom:
  text ".Layer_Name" at 129,-1122.49 h60
M15 Courtyards Top:
  text ".Layer_Name" at 129,-1122.49 h60
M16 Courtyards Bottom:
  text ".Layer_Name" at 129,-1122.49 h60
Drill Drawing:
  circle w10: c3081.62,234.83 r20
  circle w10: c3081.62,234.83 r33.33
  lines w10: 3048.29,368.17 3064.96,368.17 3064.96,351.5 3098.29,351.5 3098.29,368.17 3114.96,368.17 3114.96,401.5 3098.29,401.5 3098.29,418.17 3064.96,418.17 3064.96,401.5 3048.29,401.5 3048.29,368.17 ; 3048.29,568.17 3114.96,568.17 3081.62,501.5 3048.29,568.17 ; 3048.29,668.17 3064.96,668.17 3081.62,651.5 3098.29,668.17 3114.96,668.17 3098.29,684.83 3114.96,701.5 3098.29,701.5 3081.62,718.17 3064.96,701.5 3048.29,701.5 3064.96,684.83 3048.29,668.17 ; 3048.29,801.5 3081.62,818.17 3114.96,801.5 3098.29,834.83 3114.96,868.17 3081.62,851.5 3048.29,868.17 3064.96,834.83 3048.29,801.5 ; 3061.62,554.83 3101.62,554.83 3081.62,514.83 3061.62,554.83
  lines w15: 2988.5,156.5 6867.47,156.5 ; 2988.5,906.5 6867.47,906.5 ; 3539.38,6.5 3539.38,1056.5 ; 4237.19,6.5 4237.19,1056.5 ; 5582.79,6.5 5582.79,1056.5 ; 6088.67,6.5 6088.67,1056.5 ; 2988.5,6.5 6867.47,6.5 6867.47,1056.5 2988.5,1056.5 2988.5,6.5
  text "Symbol" at 3078.5,951.5 h72
  text "Hit Count" at 3584.38,951.5 h72
  text "Finished Hole Size" at 4282.19,951.5 h72
  text "Plated" at 5627.79,951.5 h72
  text "Hole Type" at 6133.67,951.5 h72
  text "4" at 3584.38,801.5 h60
  text "125.00mil (3.175mm)" at 4282.19,801.5 h60
  text "PTH" at 5627.79,801.5 h60
  text "Round" at 6133.67,801.5 h60
  text "4" at 3584.38,651.5 h60
  text "214.57mil (5.450mm)" at 4282.19,651.5 h60
  text "PTH" at 5627.79,651.5 h60
  text "Round" at 6133.67,651.5 h60
  text "17" at 3584.38,501.5 h60
  text "14.00mil (0.356mm)" at 4282.19,501.5 h60
  text "PTH" at 5627.79,501.5 h60
  text "Round" at 6133.67,501.5 h60
  text "69" at 3584.38,351.5 h60
  text "7.87mil (0.200mm)" at 4282.19,351.5 h60
  text "PTH" at 5627.79,351.5 h60
  text "Round" at 6133.67,351.5 h60
  text "91" at 3584.38,201.5 h60
  text "12.00mil (0.305mm)" at 4282.19,201.5 h60
  text "PTH" at 5627.79,201.5 h60
  text "Round" at 6133.67,201.5 h60
  text "185 Total" at 3584.38,51.5 h60
  text ".Layer_Name" at 129,-1122.49 h60

## Dimensions
0,0 to 0,1700 on M2 Board Dimensions
0,0 to 1980,0 on M2 Board Dimensions

## Text inside footprints (layer, text, board x,y; h text height)
ZZ1: M5 Assembly Top "Install label in silkscreened box after final wash.  Text shall be 8 pt font.  Text shall be per the Label Table in the PDF schematic." at 309,2664 h40